# EAGLE board baseboard (EAGLE 7.7.0), part 1 of 2
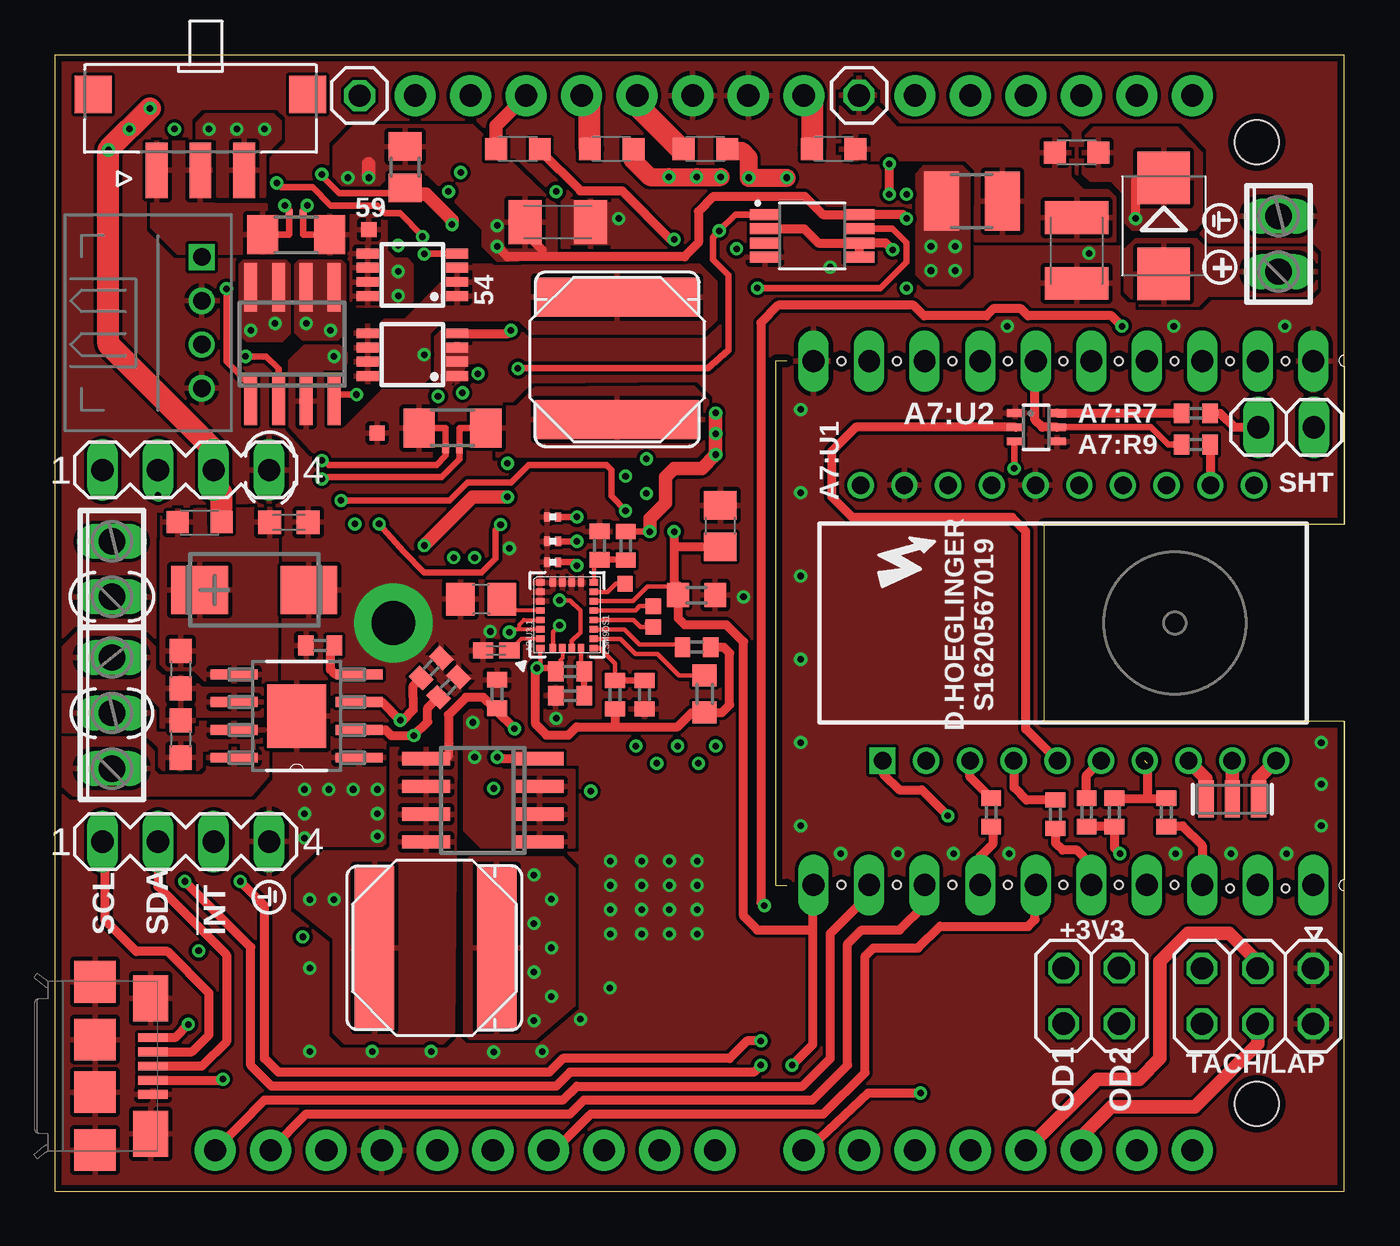
[diagram p0: board, top side]
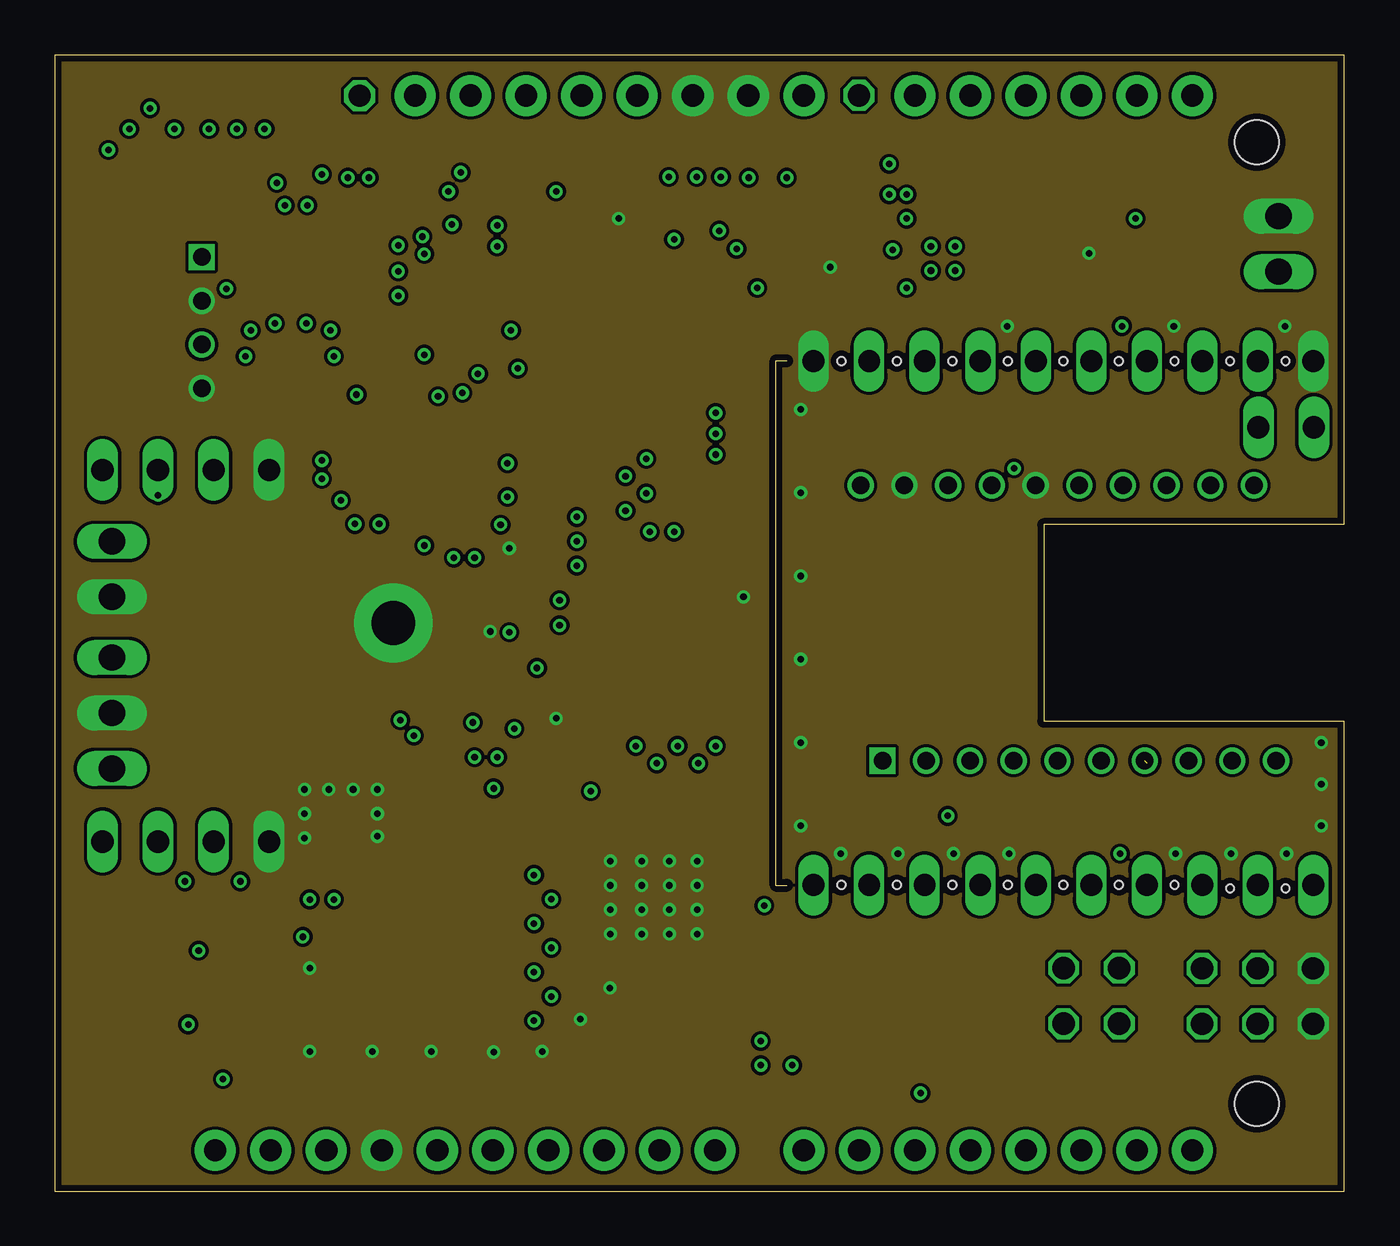
[diagram p1: board, inner layer Route2]
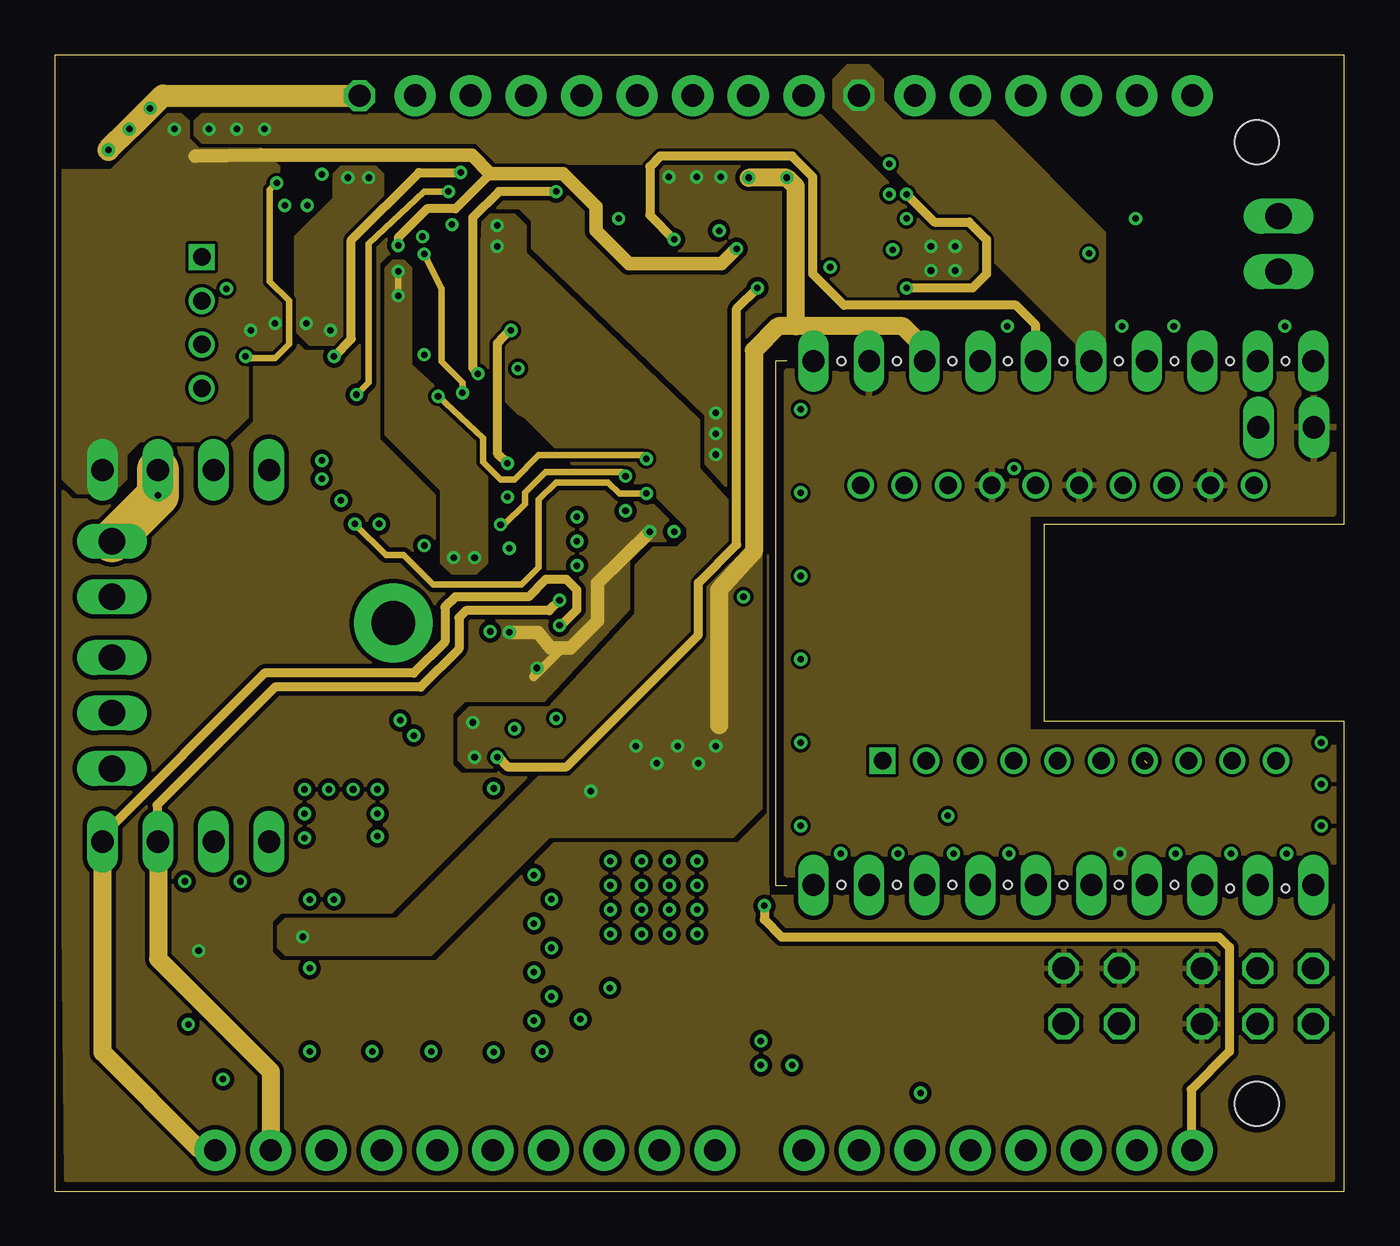
[diagram p2: board, inner layer Route15]
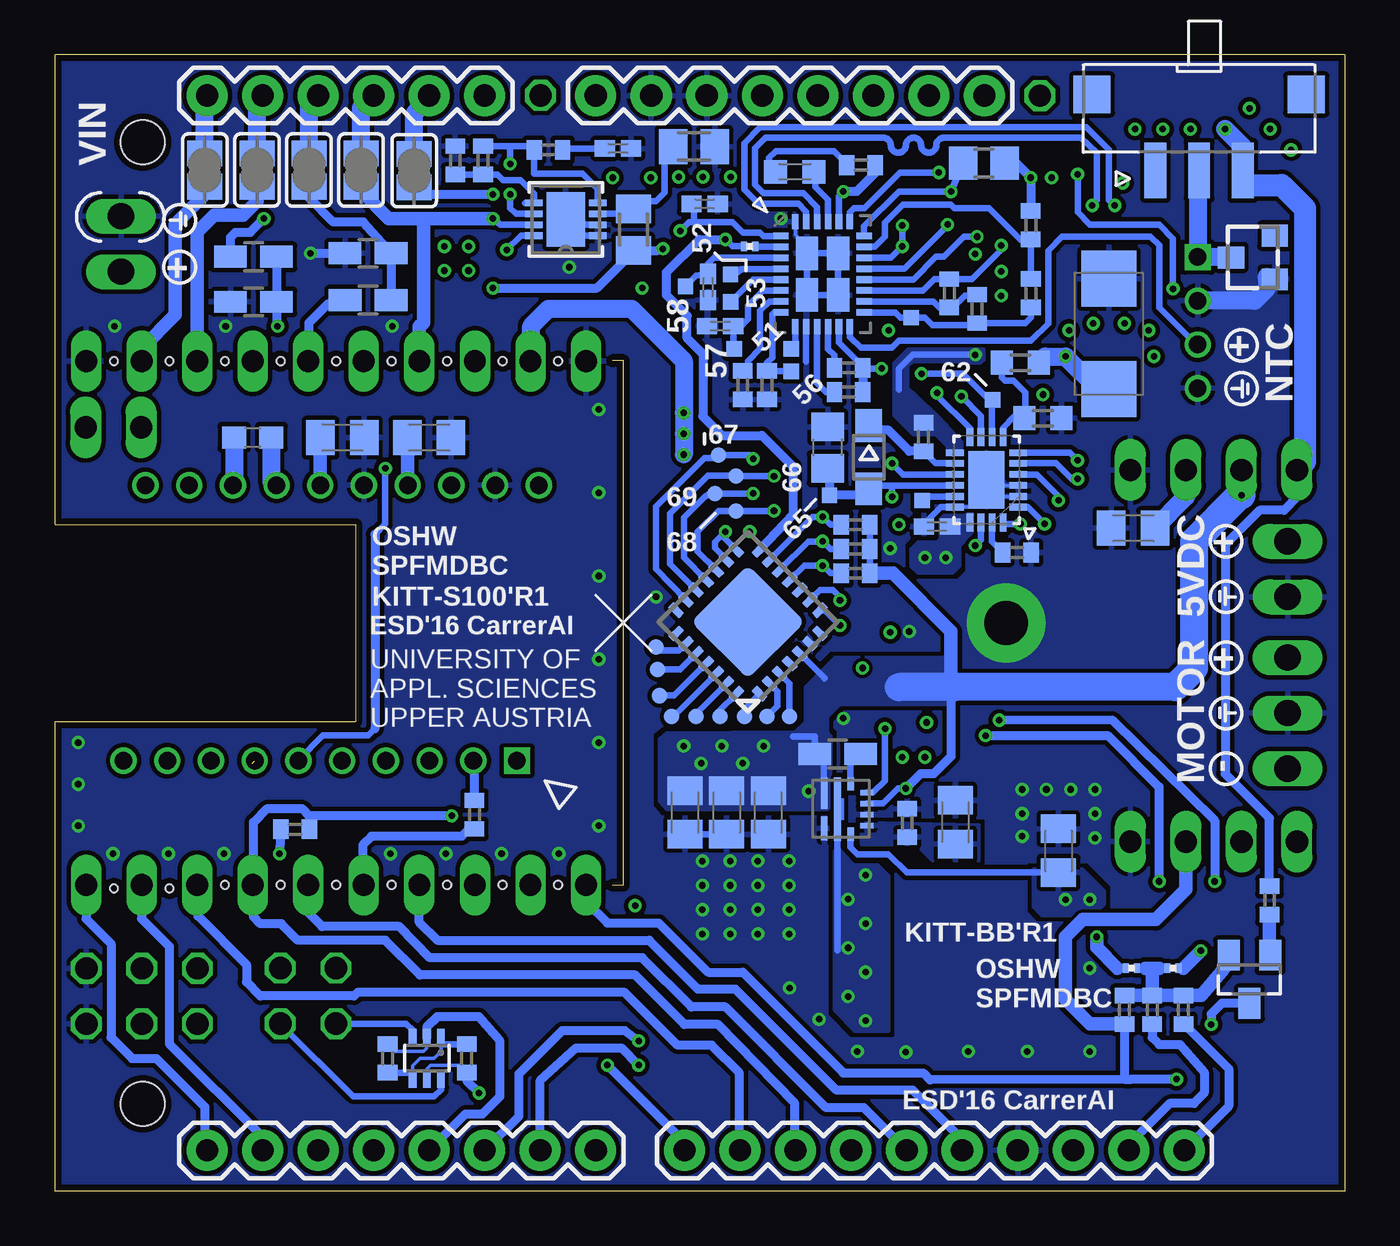
[diagram p3: board, bottom side, seen from below]

Size 59 x 52 mm. Coordinates in mm from the lower left corner, seen from the top.
Outline: 33.5,14 33,14 33,38 33.5,38
Outline: 0,52 0,0 59,0 59,21.5 45.25,21.5 45.25,30.5 59,30.5 59,52 0,52
Copper layers (1+2*15+16): Top 0.035mm / dielectric 0.38mm / Route2 0.035mm / dielectric 0.71mm / Route15 0.035mm / dielectric 0.38mm / Bottom 0.035mm
Design rules "PCB-POOL Standard_ML4": minimum track width 0.15mm, minimum drill 0.3mm, track to track 0.15mm, track to pad 0.15mm, pad to pad 0.15mm, via to via 0.15mm, smd to smd 0.15mm, copper to edge 0.3mm, drill to drill 0.2mm, minimum pad ring 0.2mm, minimum via ring 0.15mm, stop-mask expansion 0.075mm, vias tented up to drill 0mil, thermal gap 0.2mm
Holes 0.35 mm at 35.99,37.98 38.53,37.98 41.07,37.98 43.61,37.98 46.15,37.98 48.69,37.98 51.23,37.98 53.77,37.98 56.31,37.98 56.31,13.85 53.77,13.85 51.23,14.01 48.69,14.01 46.15,14.01 43.61,14.01 41.07,14.01 38.53,14.01 35.99,14.01
Holes 2 mm at 55,4 55,48
Milling: area -49,-60 to -41,-58

## Footprints (pad centres in the part's own frame; a part is rotated, then mirrored left to right if it is on the bottom)
R0402 = smd 0.7 x 0.9: 1 -0.65,0; 2 0.65,0
SC70-6 = smd 0.35 x 0.8: 1 -0.65,-0.95; 2 0,-0.95; 3 0.65,-0.95; 4 0.65,0.95; 5 0,0.95; 6 -0.65,0.95
C0805K = smd 1.3 x 1.6: 1 -1,0; 2 1,0
C0603K = smd 1.05 x 1.08: 1 -0.875,0; 2 0.875,0
CT6032 = smd 2.6 x 2.2: + -2.5,0; - 2.5,0
C0603 = smd 1.1 x 1: 1 -0.85,0; 2 0.85,0
L2012C = smd 1 x 1: 1 -1,0; 2 1,0
HSOP8 = smd 2.15 x 0.45: 1 -2.857,1.905; 2 -2.857,0.635; 3 -2.857,-0.635; 4 -2.857,-1.905; 5 2.857,-1.905; 6 2.857,-0.635; 7 2.857,0.635; 8 2.857,1.905 | smd 2.7 x 2.9: THERMAL 0,0
C0805 = smd 1.3 x 1.5: 1 -0.95,0; 2 0.95,0
C0402K = smd 0.925 x 0.74: 1 -0.6,0; 2 0.6,0
R0603 = smd 1 x 1.1: 1 -0.85,0; 2 0.85,0
LGA-24 = smd 0.29 x 0.4: 1 -0.025,2.45; 6 -0.025,0; 7 0.405,0; 8 0.835,0; 9 1.264,0; 10 1.694,0; 11 2.124,0; 12 2.554,0; 13 2.985,0; 18 2.985,2.45; 19 2.554,2.45; 20 2.124,2.45; 21 1.694,2.45; 22 1.264,2.45; 23 0.835,2.45; 24 0.405,2.45 | smd 0.4 x 0.29: 2 -0.025,1.87; 3 -0.025,1.44; 4 -0.025,1.01; 5 -0.025,0.58; 14 2.985,0.58; 15 2.985,1.01; 16 2.985,1.44; 17 2.985,1.87
TP07SQ = smd 0.7 x 0.7: TP 0,0
C1210K = smd 1.5 x 2.9: 1 -1.5,0; 2 1.5,0
SMB = smd 2.4 x 2.4: A 2.2,0; C -2.2,0
R1210 = smd 1.6 x 2.7: 1 -1.4,0; 2 1.4,0
R0805W = smd 1.5 x 1: 1 -1.052,0; 2 1.052,0
C1206K = smd 1.5 x 2: 1 -1.5,0; 2 1.5,0
R1206-KELV = smd 1.422 x 1.778: + -1.524,0; - 1.524,0 | smd 0.305 x 0.406: K+ -0.318,-0.953; K- 0.318,-0.953
R0805 = smd 1.3 x 1.5: 1 -0.95,0; 2 0.95,0
SOIC8 = smd 0.6 x 2.2: 1 -1.905,-2.6; 2 -0.635,-2.6; 3 0.635,-2.6; 4 1.905,-2.6; 5 1.905,2.6; 6 0.635,2.6; 7 -0.635,2.6; 8 -1.905,2.6
QFN-28_UFD-L = smd 0.703 x 0.3: 1 -1.902,1.75; 2 -1.902,1.25; 3 -1.902,0.75; 4 -1.902,0.25; 5 -1.902,-0.25; 6 -1.902,-0.75; 7 -1.902,-1.25; 8 -1.902,-1.75; 15 1.902,-1.75; 16 1.902,-1.25; 17 1.902,-0.75; 18 1.902,-0.25; 19 1.902,0.25; 20 1.902,0.75; 21 1.902,1.25; 22 1.902,1.75 | smd 0.3 x 0.703: 9 -1.25,-2.402; 10 -0.75,-2.402; 11 -0.25,-2.402; 12 0.25,-2.402; 13 0.75,-2.402; 14 1.25,-2.402; 23 1.25,2.402; 24 0.75,2.402; 25 0.25,2.402; 26 -0.25,2.402; 27 -0.75,2.402; 28 -1.25,2.402 | smd 1.016 x 1.524: EP-NE 0.714,0.953; EP-NW -0.714,0.953; EP-SE 0.714,-0.953; EP-SW -0.714,-0.953
C0402 = smd 0.7 x 0.9: 1 -0.65,0; 2 0.65,0
C/6032-28R = smd 2.55 x 2.5: + 2.525,0; - -2.525,0
SOD323-W = smd 1.5 x 1.2: A 1.45,0; C -1.45,0
TAIYO-YUDEN.NRS8030T4R7MJGJ = smd 1.8 x 7.5: 1 -2.54,0; 2 3.06,0
MSOP8 = smd 0.45 x 1: 1 -0.975,-2.05; 2 -0.325,-2.05; 3 0.325,-2.05; 4 0.975,-2.05; 5 0.975,2.05; 6 0.325,2.05; 7 -0.325,2.05; 8 -0.975,2.05
QFN50P = smd 0.813 x 0.305: 1 -1.448,1.245; 2 -1.448,0.762; 3 -1.448,0.254; 4 -1.448,-0.254; 5 -1.448,-0.762; 6 -1.448,-1.245; 11 1.448,-1.245; 12 1.448,-0.762; 13 1.448,-0.254; 14 1.448,0.254; 15 1.448,0.762; 16 1.448,1.245 | smd 0.305 x 0.813: 7 -0.762,-1.956; 8 -0.254,-1.956; 9 0.254,-1.956; 10 0.762,-1.956; 17 0.762,1.956; 18 0.254,1.956; 19 -0.254,1.956; 20 -0.762,1.956 | smd 1.651 x 2.642: 21 0,0
TP07R = smd 0.7 x 0.7: TP 0,0
C1608 = smd 1.1 x 1: 1 -0.85,0; 2 0.85,0
1X02 = drill 1.016 long: 1 -1.27,0; 2 1.27,0
ADNS-3080 = drill 0.8 square: 1 -8.126,-6.3 | drill 0.8: 2 -6.126,-6.3; 3 -4.126,-6.3; 4 -2.126,-6.3; 5 -0.126,-6.3; 6 1.874,-6.3; 7 3.874,-6.3; 8 5.874,-6.3; 9 7.874,-6.3; 10 9.874,-6.3; 11 8.874,6.3; 12 6.874,6.3; 13 4.874,6.3; 14 2.874,6.3; 15 0.874,6.3; 16 -1.126,6.3; 17 -3.126,6.3; 18 -5.126,6.3; 19 -7.126,6.3; 20 -9.126,6.3
RESON-SMD = smd 0.7 x 1.7: 1 -1.2,0; 2 0,0; 3 1.2,0
PAD40MIL.BREAK = drill 1 pad 1.016 long: P$1 0,0
QFN28-ML_6X6MM = smd 0.7 x 0.35: 1 -2.7,1.95; 2 -2.7,1.3; 3 -2.7,0.65; 4 -2.7,0; 5 -2.7,-0.65; 6 -2.7,-1.3; 7 -2.7,-1.95; 15 2.7,-1.95; 16 2.7,-1.3; 17 2.7,-0.65; 18 2.7,0; 19 2.7,0.65; 20 2.7,1.3; 21 2.7,1.95 | smd 0.35 x 0.7: 8 -1.95,-2.7; 9 -1.3,-2.7; 10 -0.65,-2.7; 11 0,-2.7; 12 0.65,-2.7; 13 1.3,-2.7; 14 1.95,-2.7; 22 1.95,2.7; 23 1.3,2.7; 24 0.65,2.7; 25 0,2.7; 26 -0.65,2.7; 27 -1.3,2.7; 28 -1.95,2.7 | smd 3.7 x 3.7: EXP 0,0
R0201 = smd 0.28 x 0.43: 1 -0.255,0; 2 0.255,0
9-VQFN-HR = smd 1.1 x 0.3: 1 -0.895,0.77 | smd 2.9 x 0.3: 2 0,0.17 | smd 0.6 x 0.3: 3 -1.15,-0.425; 8 1.15,-0.425 | smd 0.25 x 0.6: 4 -0.75,-1.175; 5 -0.25,-1.175; 6 0.25,-1.175; 7 0.75,-1.175 | smd 1.45 x 0.3: 9 0.72,0.77
M0805 = smd 1.3 x 1.6: 1 -0.95,0; 2 0.95,0
DFN-8_DD = smd 0.787 x 0.305: 1 -1.46,0.75; 2 -1.46,0.25; 3 -1.46,-0.25; 4 -1.46,-0.75; 5 1.46,-0.75; 6 1.46,-0.25; 7 1.46,0.25; 8 1.46,0.75 | smd 1.753 x 2.489: EP 0,0
SOP65P490X110-8N = smd 1.38 x 0.5: 1 -2.165,0.975; 2 -2.165,0.325; 3 -2.165,-0.325; 4 -2.165,-0.975; 5 2.165,-0.975; 6 2.165,-0.325; 7 2.165,0.325; 8 2.165,0.975
SOT23 = smd 1 x 1.4: 1 -0.95,-1.1; 2 0.95,-1.1; 3 0,1.1
TO236 = smd 1 x 1.2: 1 -1,-1; 2 0,1; 3 1,-1
10118192-0001LF = smd 0.4 x 1.35: 1 -1.3,4.1; 2 -0.65,4.1; 3 0,4.1; 4 0.65,4.1; 5 1.3,4.1 | smd 1.9 x 1.9: M1 -1.2,1.45; M2 1.2,1.45; S1 -3.85,1.45; S2 3.85,1.45 | smd 2.1 x 1.6: S3 -3.1,4; S4 3.1,4
1X01 = drill 1.016 octagon: 1 0,0
2X02 = drill 1.016 octagon: 1 -1.27,-1.27; 2 -1.27,1.27; 3 1.27,-1.27; 4 1.27,1.27
SW_SS312SAH4-R = smd 2.55 x 1: 1 1.525,-2; 2 1.525,0; 3 1.525,2 | smd 1.7 x 1.7: P$1 -1.95,-4.9; P$2 -1.95,4.9
MA04-1 = drill 1.016 long: 1 -3.81,0; 2 -1.27,0; 3 1.27,0; 4 3.81,0
JST-PHR-4 = drill 0.8 square: 1 0,0 | drill 0.8: 2 -2,0; 3 -4,0; 4 -6,0
2X03 = drill 1.016 octagon: 1 -2.54,-1.27; 2 -2.54,1.27; 3 0,-1.27; 4 0,1.27; 5 2.54,-1.27; 6 2.54,1.27
3POL254 = drill 1.2 long: 1 -2.54,0; 2 0,0; 3 2.54,0
2POL254 = drill 1.2 long: 1 -1.27,0; 2 1.27,0
AU_PINS = drill 1.016 pad 1.88: 3.3V -8.89,-24.13; 5V -6.35,-24.13; ADC.0 6.35,-24.13; ADC.1 8.89,-24.13; ADC.2 11.43,-24.13; ADC.3 13.97,-24.13; ADC.4 16.51,-24.13; ADC.5 19.05,-24.13; AREF -20.574,24.13; GND2 -1.27,-24.13; GND3 -3.81,-24.13; GND.1 -18.034,24.13; I/OREF -13.97,-24.13; IO.0 19.05,24.13; IO.1 16.51,24.13; IO.2 13.97,24.13; IO.3 11.43,24.13; IO.4 8.89,24.13; IO.5 6.35,24.13; IO.6 3.81,24.13; IO.7 1.27,24.13; IO.8 -2.794,24.13; IO.9 -5.334,24.13; IO.10 -7.874,24.13; IO.11 -10.414,24.13; IO.12 -12.954,24.13; IO.13 -15.494,24.13; N/C -16.51,-24.13; RESET -11.43,-24.13; SCL -25.654,24.13; SDA -23.114,24.13; VIN 1.27,-24.13
SJ = smd 1.168 x 1.6: 1 -0.762,0; 2 0.762,0

## Placement (x,y rotation side)
A1:R1  10kR/⎑  [R0402]  43.79,6.08 90 bottom
A1:R2  10kR/⎑  [R0402]  40.17,6.08 270 bottom
A1:U1  SI1922EDH  [SC70-6]  42,6.09 180 bottom
A2:C1  4.7uF/25V  [C0805K]  9.68,30.34 180 bottom
A2:C2  100nF/25V⇤  [C0603K]  10.72,30.61 0 top
A2:C3  47uF/25V⇤  [CT6032]  9.13,27.51 0 top
A2:C4  220nF/25V⇤  [C0603]  5.76,23.86 270 top
A2:C5  220nF/25V⇤  [C0603]  5.76,20.69 270 top
A2:L1  BEAD  [L2012C]  6.63,30.61 0 top
A2:R1  10kR/⎑  [R0402]  17.23,23.94 45 top
A2:R2  10kR/⎑  [R0402]  18.02,23.07 45 top
A2:R3  2k2R  [R0402]  12.14,24.97 180 top
A2:U1  DRV8871  [HSOP8]  11.08,21.74 180 top
A3:C3.1  10nF/⇤  [C0805]  19.52,27.09 180 top
A3:C3.2  100nF/⇤  [C0402K]  20.2,24.74 180 top
A3:C3.XX  10nF/⇤  [C0805]  30.45,30.43 90 top
A3:R3.1  10kR/⎒  [R0603]  29.73,22.75 90 top
A3:R3.2  10kR/⎒  [R0402]  29.37,24.89 180 top
A3:R3.3  10kR/⎑  [R0402]  23.57,22.67 180 top
A3:R3.4  10kR/⎑  [R0402]  26.99,22.72 270 top
A3:R3.5  10kR/⎒  [R0402]  25.64,22.72 90 top
A3:R3.6  10kR/⎒  [R0402]  23.57,23.78 0 top
A3:R3.9  60R/⇤  [R0603]  29.37,27.28 0 top
A3:R3.10  10k/⎒  [R0402]  26.13,29.53 270 top
A3:R3.11  10kR/⎑  [R0402]  24.92,29.54 90 top
A3:U3.1  LSM9DS1  [LGA-24]  24.66,24.87 90 top
A3:☇1  PTR1TP07SQ  [TP07SQ]  27.38,25.81 0 top
A3:☇2  PTR1TP07SQ  [TP07SQ]  27.38,26.77 0 top
A3:☇3  PTR1TP07SQ  [TP07SQ]  26.09,27.8 0 top
A4:C1  10uF  [C1210K]  46.75,43.04 270 top
A4:D1  [SMB]  50.74,44.17 270 top
A4:F1  1.5A->750mA  [R1210]  41.96,45.29 180 top
A4:L1  BEAD  [L2012C]  46.75,47.52 180 top
A4:R1  10kR  [R0805W]  49.93,42.75 180 bottom
A4:R2  2.2kR  [R0805W]  49.93,40.69 0 bottom
A4:R3  10kR  [R0805W]  44.68,40.77 180 bottom
A4:R4  2.2kR  [R0805W]  44.69,42.91 0 bottom
A5:C1  47nF/⇤  [C0603K]  25.16,46.64 0 bottom
A5:C2  100uF/~5V  [C1206K]  23.02,44.34 0 top
A5:C4  1uF/⇤  [C0402K]  29.29,45.17 0 bottom
A5:C5  10nF/⇤  [C0402K]  29.13,41.37 270 bottom
A5:C6  10nF/⇤  [C0402K]  28.58,39.58 180 bottom
A5:R1  8.2mR/⚻  [R1206-KELV]  11.05,43.76 180 top
A5:R2  16kR/⇤  [R0402]  22.13,46.94 0 bottom
A5:R3  1MR  [R0805]  16.51,47.04 180 bottom
A5:R4  270kR  [R0402]  14.37,44.2 90 bottom
A5:R5  5mR  [R0805]  16.03,46.85 90 top
A5:R6  100kR/1%  [R0402]  14.37,41.08 90 bottom
A5:R7  27kR/1%  [R0402]  16.83,40.37 270 bottom
A5:R8  68kR/1%  [R0402]  18.1,41.08 90 bottom
A5:R9  1kR/⇤  [R0402]  26.43,36.88 90 bottom
A5:R10  1kR/⇤  [R0402]  27.54,36.88 90 bottom
A5:R11  10kR/⎒  [R0402]  22.7,37.67 0 bottom
A5:R12  10kR/⎒  [R0402]  22.7,36.56 0 bottom
A5:T1  IRF7328  [SOIC8]  10.88,38.75 0 top
A5:U1  LTC4000LTC4000EUFD#XXX  [QFN-28_UFD-L]  23.89,41.96 0 bottom
A5:☇1  PTR1TP07SQ  [TP07SQ]  25.32,38.54 180 bottom
A5:☇2  PTR1TP07SQ  [TP07SQ]  28.1,40.69 180 bottom
A5:☇3  PTR1TP07SQ  [TP07SQ]  28.1,41.94 180 bottom
A5:☇4  PTR1TP07SQ  [TP07SQ]  19.84,39.97 0 bottom
A5:☇6  PTR1TP07SQ  [TP07SQ]  25.32,37.52 180 bottom
A5:☇7  PTR1TP07SQ  [TP07SQ]  27.94,38.54 180 bottom
A5:☇8  PTR1TP07SQ  [TP07SQ]  30.16,41.4 180 bottom
A5:☇9  PTR1TP07SQ  [TP07SQ]  14.37,43.99 0 top
A6:C1  1nF/⇤  [C0402]  15,29.23 0 bottom
A6:C2  4.7uF/⇤  [C0805]  23.66,34.02 90 bottom
A6:C3  100nF/⇤  [C0402]  19.27,34.5 90 bottom
A6:C4  100uF  [C/6032-28R]  10.8,39.23 270 bottom
A6:C5  1uF/⇤  [C0402K]  18.65,30.42 180 bottom
A6:D1  30VBD,0.2A  [SOD323-W]  21.78,33.58 270 bottom
A6:L1  10uH  [TAIYO-YUDEN.NRS8030T4R7MJGJ]  25.73,37.85 90 top
A6:R1  15mR/25mW⚻  [R1206-KELV]  18.2,34.92 0 top
A6:R2  51kR/1%  [R0603]  14.84,37.91 180 bottom
A6:R3  12kR/1%  [R0603]  13.81,35.37 0 bottom
A6:T1  XX  [MSOP8]  16.37,41.93 90 top
A6:T2  XX  [MSOP8]  16.37,38.28 90 top
A6:U1  LTC3891QFN50P  [QFN50P]  16.39,32.55 180 bottom
A6:☇1  PTR1TP07SQ  [TP07SQ]  19.33,31.6 270 bottom
A6:☇2  PTR1TP07SQ  [TP07SQ]  16.11,36.21 0 bottom
A6:☇3  PTR1TP07SQ  [TP07SQ]  14.75,34.69 0 top
A6:☇5  PTR1TP07SQ  [TP07SQ]  23.57,31.85 180 bottom
A6:☇6  PTR1TP07R  [TP07R]  27.86,32.72 180 bottom
A6:☇7  PTR1TP07R  [TP07R]  28.66,33.67 0 bottom
A6:☇8  PTR1TP07R  [TP07R]  27.86,31.13 0 bottom
A6:☇9  PTR1TP07R  [TP07R]  28.81,31.92 180 bottom
A7:C1  2.2uF/⇤  [C1608]  49.96,34.49 0 bottom
A7:C2  100nF/⇤  [C0805K]  41.89,34.48 0 bottom
A7:C3  100nF/⇤  [C0805K]  45.86,34.48 0 bottom
A7:DCL1  DCL.OSH'3MM-SLK'  [DCL.LOGO-OSH.3MM]  18.78,9.38 0 bottom
A7:DCL2  DCL.OSH'3MM-SLK'  [DCL.LOGO-OSH.3MM]  35.46,29.4 0 bottom
A7:J1  [1X02]  56.34,34.95 180 top
A7:R1  10kR/⎒  [R0402]  48.02,16.56 0 bottom
A7:R2  100R/⇤  [R0402]  39.82,17.23 90 bottom
A7:R3  100R/⇤  [R0402]  42.84,17.33 90 top
A7:R4  100R/⇤  [R0402]  45.78,17.25 90 top
A7:R5  10kR/⎒  [R0402]  47.21,17.33 90 top
A7:R6  10kR/⎒  [R0402]  48.48,17.33 90 top
A7:R7  200R  [R0402]  52.21,35.59 0 top
A7:R8  0R  [R0402]  50.86,17.33 270 top
A7:R9  10kR/⎒  [R0402]  52.21,34.16 180 top
A7:U1  ADNS-3080  [ADNS-3080]  46,26 0 top
A7:U2  SI1922EDH  [SC70-6]  44.91,34.95 270 top
A7:Y1  24MHz  [RESON-SMD]  53.87,17.95 180 top
A7:⌁1  SINGLEPAD40MIL-BREAK  [PAD40MIL.BREAK]  34.72,37.98 0 top
A7:⌁2  SINGLEPAD40MIL-BREAK  [PAD40MIL.BREAK]  47.42,37.98 0 top
A7:⌁3  SINGLEPAD40MIL-BREAK  [PAD40MIL.BREAK]  42.34,37.98 0 top
A7:⌁4  SINGLEPAD40MIL-BREAK  [PAD40MIL.BREAK]  37.26,37.98 0 top
A7:⌁5  SINGLEPAD40MIL-BREAK  [PAD40MIL.BREAK]  39.8,37.98 0 top
A7:⌁6  SINGLEPAD40MIL-BREAK  [PAD40MIL.BREAK]  44.88,37.98 0 top
A7:⌁7  SINGLEPAD40MIL-BREAK  [PAD40MIL.BREAK]  49.96,37.98 0 top
A7:⌁8  SINGLEPAD40MIL-BREAK  [PAD40MIL.BREAK]  52.5,37.98 0 top
A7:⌁9  SINGLEPAD40MIL-BREAK  [PAD40MIL.BREAK]  55.04,37.98 0 top
A7:⌁10  SINGLEPAD40MIL-BREAK  [PAD40MIL.BREAK]  57.58,37.98 0 top
A7:⌁11  SINGLEPAD40MIL-BREAK  [PAD40MIL.BREAK]  57.58,14.01 180 top
A7:⌁12  SINGLEPAD40MIL-BREAK  [PAD40MIL.BREAK]  55.04,14.01 180 top
A7:⌁13  SINGLEPAD40MIL-BREAK  [PAD40MIL.BREAK]  52.5,14.01 180 top
A7:⌁14  SINGLEPAD40MIL-BREAK  [PAD40MIL.BREAK]  49.96,14.01 180 top
A7:⌁15  SINGLEPAD40MIL-BREAK  [PAD40MIL.BREAK]  47.42,14.01 180 top
A7:⌁16  SINGLEPAD40MIL-BREAK  [PAD40MIL.BREAK]  44.88,14.01 180 top
A7:⌁17  SINGLEPAD40MIL-BREAK  [PAD40MIL.BREAK]  42.34,14.01 180 top
A7:⌁18  SINGLEPAD40MIL-BREAK  [PAD40MIL.BREAK]  39.8,14.01 180 top
A7:⌁19  SINGLEPAD40MIL-BREAK  [PAD40MIL.BREAK]  37.26,14.01 180 top
A7:⌁20  SINGLEPAD40MIL-BREAK  [PAD40MIL.BREAK]  34.72,14.01 180 top
A8:IC1  MCP23017ML  [QFN28-ML_6X6MM]  27.31,26.05 135 bottom
A8:R1  10kR/⎒  [R0402]  22.38,29.38 180 bottom
A8:R2  10kR/⎑  [R0201]  22.78,29.74 180 top
A8:R3  10kR/⎒  [R0402]  22.38,30.5 180 bottom
A8:R4  10kR/⎒  [R0201]  22.78,30.85 180 top
A8:R5  10kR/⎒  [R0402]  22.38,28.27 180 bottom
A8:R6  10kR/⎒  [R0201]  22.78,28.78 180 top
A8:TP2  TPTP07R  [TP07R]  31.51,24.89 0 bottom
A8:TP3  TPTP07R  [TP07R]  31.43,23.86 0 bottom
A8:TP4  TPTP07R  [TP07R]  31.35,22.67 0 bottom
A9:C1  10uF/⇤  [C0805K]  13.1,15.58 90 bottom
A9:C2  22uF/⇤  [C0805K]  26.37,17.33 270 bottom
A9:C3  22uF/⇤  [C0805K]  28.28,17.33 270 bottom
A9:C4  22uF/⇤  [C0805K]  30.18,17.33 270 bottom
A9:C5  100nF  [C0805K]  17.81,16.89 90 bottom
A9:L1  1uH  [TAIYO-YUDEN.NRS8030T4R7MJGJ]  17.17,11.14 0 top
A9:R1  10kR/⎒  [R0805W]  23.2,20 180 bottom
A9:R2  0R/⎵  [R0402]  20.02,16.85 270 bottom
A9:R3  100kR/⎵  [R0402]  20.24,22.75 270 top
A9:U1  TPS6123X5V  [9-VQFN-HR]  23.04,17.49 90 bottom
A10:C1  1uF/⇤  [C0402K]  33.26,47.71 0 bottom
A10:R1  430R  [R0402]  36.43,47.64 180 bottom
A10:R2  25kR  [R0402]  39.43,47.17 270 bottom
A10:R3  XXMR  [M0805]  29.77,47.8 180 bottom
A10:R4  XXMR  [M0805]  32.54,43.99 270 bottom
A10:R7  2.32MR  [R0402]  40.7,47.17 270 bottom
A10:REF1  EAGLE EDU LIMIT  [REF_EAGLE.EDULIMIT]  -109.5,-176.5 0 top  (outside the outline)
A10:REF2  REF.LOGO.UASUA  [REF_LOGO_UASUA]  -116.5,-192 0 top  (outside the outline)
A10:T1  SI4427BDY  [SOIC8]  19.59,17.89 90 top
A10:U1  LTC1540CDD  [DFN-8_DD]  35.64,44.47 180 bottom
A10:U2  2NANDSOP8  [SOP65P490X110-8N]  34.65,43.71 0 top
D1  BAS40-05  [SOT23]  4.37,9.7 180 bottom
D2  MMBZXAL  [TO236]  4.21,42.72 90 bottom
J1  MICROUSB-FEM  [10118192-0001LF]  0.4,5.73 270 top
JP1  [1X01]  36.8,50.14 0 top
JP2  [1X01]  13.95,50.13 0 top
JP4  [2X02]  47.43,8.94 0 top
L1  BEAD/0R/⎵  [L2012C]  29.77,47.67 180 top
L2  BEAD/0R/⎵  [L2012C]  25.48,47.67 180 top
L4  BEAD/0R/⎵  [L2012C]  35.64,47.67 180 top
L5  BEAD/0R/⎵  [L2012C]  21.19,47.67 180 top
R1  100R  [R0402]  3.45,13.31 270 bottom
R2  [R0201]  27.23,43.23 0 bottom
R3  10k/⎒  [R0402]  7.38,8.3 90 bottom
R4  10k/⎒  [R0402]  8.81,8.3 90 bottom
R5  10k/⎒  [R0402]  10.08,8.3 90 bottom
R6  [R0201]  7.86,10.21 0 bottom
R7  [R0201]  9.76,10.21 180 bottom
S1  SS312SAH4-R  [SW_SS312SAH4-R]  6.67,48.23 270 bottom
S3  SS312SAH4-R  [SW_SS312SAH4-R]  6.67,48.23 270 top
SV1  [MA04-1]  6,16 0 top
SV2  [MA04-1]  6,33 0 top
TP2  TPTP07R  [TP07R]  30.8,21.72 0 bottom
TP3  TPTP07R  [TP07R]  29.69,21.72 0 bottom
TP4  TPTP07R  [TP07R]  28.58,21.72 0 bottom
TP5  TPTP07R  [TP07R]  27.46,21.72 0 bottom
TP6  TPTP07R  [TP07R]  26.43,21.72 0 bottom
TP7  TPTP07R  [TP07R]  25.4,21.72 0 bottom
U$1  [A4L-LOC]  -56.25,-67.25 0 top  (outside the outline)
X1  JST-4POS-2X4POS  [JST-PHR-4]  6.73,42.74 90 top
X1.2  TACH/LAP  [2X03]  55.03,8.93 180 top
X2  [3POL254]  2.62,21.88 90 top
X2.2  VRAILS+  [2POL254]  55.99,43.34 90 top
X2.3  5V+SoC  [2POL254]  2.62,28.47 90 top
XA1  ARDUINO_UNO  [AU_PINS]  33,26 180 bottom
☈1  [SJ]  42.58,46.69 90 bottom
☈2  [SJ]  45.01,46.72 90 bottom
☈3  [SJ]  47.39,46.72 90 bottom
☈10  [SJ]  49.77,46.72 90 bottom
☈11  [SJ]  52.15,46.72 90 bottom

## Library data of the parts
A1:R1 A1:R2 A2:C1-A2:C3 A2:L1 A2:R1-A2:R3 A3:C3.1 A3:C3.2 A3:C3.XX A3:R3.1-A3:R3.6 A3:R3.9-A3:R3.11 A4:C1 A4:F1 A4:L1 A4:R1-A4:R4 A5:C1 A5:C2 A5:C4-A5:C6 A5:R2-A5:R12 A6:C1-A6:C5 A6:R2 A6:R3 A7:C1-A7:C3 A7:R1-A7:R9 A8:R1-A8:R6 A9:C1-A9:C5 A9:R1 A10:C1 A10:R1-A10:R4 A10:R7 L1 L2 L4 L5 R1-R7 = rcl
A1:U1 A2:U1 A6:U1 A7:U1 A7:U2 A10:T1 A10:U2 = kitt.ic
A2:C4 A2:C5 A9:R2 A9:R3 = resistor
A3:U3.1 = kitt.ic; AVAILABILITY: Unavailable; CC: XYX17; DESCRIPTION: iNEMO inertial module: 3D accelerometer, 3D gyroscope, 3D magnetometer; MF: STMicroelectronics; MP: LSM9DS1; PACKAGE: None; PRICE: None
A3:☇1-A3:☇3 A5:☇1-A5:☇4 A5:☇6-A5:☇9 A6:☇1-A6:☇3 A6:☇5-A6:☇9 A8:TP2-A8:TP4 TP2-TP7 = testpad
A4:D1 A6:D1 D1 = diode
A5:R1 A6:L1 A6:R1 A9:L1 = kitt.psvs
A5:T1 A5:U1 A9:U1 A10:U1 D2 = kitt.ic; CC: XYX17
A6:T1 A6:T2 = zetex; OC_FARNELL: unknown; OC_NEWARK: unknown
A7:DCL1 A7:DCL2 A10:REF1 A10:REF2 = kitt.refs
A7:J1 JP1 JP2 JP4 X1.2 = pinhead
A7:Y1 = Ai_Passives
A7:⌁1-A7:⌁20 XA1 = kitt.con
A8:IC1 = microchip; MF: MICROCHIP; MPN: MCP23017-E/ML; OC_FARNELL: unknown; OC_NEWARK: 31K2957
J1 = kitt.con; AVAILABILITY: Good; DESCRIPTION: Conn Micro USB Type B RCP 5 POS 0.65mm Solder RA SMD 5 Terminal 1 Port T/R; MF: FCI; MP: 10118192-0001LF; PACKAGE: None; PRICE: 0.24 USD
S1 S3 = kitt.psvs; AVAILABILITY: Good; DESCRIPTION: Switch Slide ON None ON SPDT Side Slide 0.1A 28VAC 28VDC 0.4VA 10000Cycles Gull Wing SMD T/R; MF: NKK Switches; MP: SS312SAH4-R; PACKAGE: None; PRICE: 2.48 USD
SV1 SV2 = con-lstb; OC_FARNELL: unknown; OC_NEWARK: unknown
U$1 = frames
X1 = kitt.con; CC: XYX17
X2 X2.2 X2.3 = con-phoenix-254; OC_FARNELL: unknown; OC_NEWARK: unknown
☈1-☈3 ☈10 ☈11 = jumper

## Nets
!CS0: A7:R1.2 A7:U1.1 A7:⌁14.P$1 XA1.IO.10
!CS1: A7:R8.2 A7:⌁13.P$1 XA1.IO.9
!RST: A5:U1.2 R2.2
+3V3: A3:R3.1.1 A3:R3.2.1 A3:R3.5.1 A3:R3.6.1 A3:R3.10.1 A3:U3.1.1 A3:U3.1.3 A3:U3.1.22 A3:U3.1.23 A7:C2.1 A7:C3.1 A7:J1.1 A7:R1.1 A7:R5.1 A7:R6.1 A7:R9.1 A7:U1.12 A7:U1.15 A7:U1.17 A7:⌁4.P$1 JP4.2 JP4.4 L2.1 R6.2 X1.2.5 X1.2.6
+4.1V: A5:R8.2 A5:T1.7 A5:T1.8 A5:U1.17 A10:R4.2 R1.1 S1.3 SV2.1 ☈1.1
+5V: A7:⌁5.P$1 A8:IC1.5 A8:R1.1 A8:R3.1 A8:R5.1 A9:C2.1 A9:C3.1 A9:C4.1 A9:R1.2 A9:U1.6 A9:U1.9 L1.1 R7.2 SV2.2 X2.3.2
+18V: A2:C1.1 A2:L1.2 JP2.1 SV2.3
+24V: A4:C1.1 A4:F1.1 A4:L1.2 A4:R3.2 A7:⌁2.P$1 JP1.1 L4.1
A1:COM: A1:R1.1 A1:R2.1 A1:U1.1 A1:U1.4
A2:ILIM: A2:R3.1 A2:U1.4
A2:VM: A2:C2.1 A2:C3.+ A2:C4.1 A2:L1.1 A2:U1.5
A3:CS_AG: A3:R3.1.2 A3:U3.1.7
A3:CS_M: A3:R3.2.2 A3:U3.1.8
A3:DEN_AG: A3:R3.10.2 A3:R3.11.1 A3:U3.1.13
A3:DRDY_M: A3:U3.1.9 A3:☇1.TP
A3:INT2_AG: A3:U3.1.12 A3:☇3.TP
A3:INT_M: A3:U3.1.10 A3:☇2.TP
A3:SDO_AG: A3:R3.3.1 A3:R3.6.2 A3:U3.1.5
A3:SDO_M: A3:R3.4.1 A3:R3.5.2 A3:U3.1.6
A3:↔C1: A3:C3.2.1 A3:U3.1.24
A3:↔CAP: A3:C3.1.1 A3:U3.1.21
A4:N$1: A4:D1.C A4:L1.1 A4:R1.2
A5:BGATE: A5:T1.2 A5:U1.18
A5:CC: A5:C1.2 A5:U1.25
A5:CL: A5:R9.2 A5:U1.8 A5:☇6.TP
A5:CSN: A5:R5.1 A5:T1.1 A5:U1.19
A5:CX: A5:R10.2 A5:U1.7
A5:IBMON: A5:C6.1 A5:U1.6 A5:☇7.TP
A5:IGATE: A5:R3.2 A5:T1.4 A5:U1.22
A5:IIMON: A5:C5.1 A5:U1.3 A5:☇8.TP
A5:IL: A5:U1.4 A5:☇3.TP
A5:N$4: A5:C1.1 A5:R2.1
A5:N$8: A5:R7.1 A5:R8.1 A5:U1.16
A5:OFB: A5:R4.1 A5:R6.2 A5:U1.21
A5:TMR: A5:U1.9 A5:☇1.TP
A5:↔CLN: A5:R1.K+ A5:U1.26
A5:↔FBG: A5:R6.1 A5:R7.2 A5:U1.15 A5:☇4.TP
A5:↔IN: A5:R1.K- A5:U1.27
A6:BG: A6:T2.4 A6:U1.13
A6:DDC.EXTVCC: A6:U1.15 A6:☇1.TP
A6:SW✳: A6:C3.2 A6:L1.2 A6:T1.1 A6:T1.2 A6:T1.3 A6:T2.5 A6:T2.6 A6:T2.7 A6:T2.8 A6:U1.11
A6:TG: A6:T1.4 A6:U1.10
A6:TRACK/SS: A6:C1.1 A6:U1.19
A6:~SENSE+: A6:L1.1 A6:R1.-
A6:↔BOOST: A6:C3.1 A6:D1.C A6:U1.12
A6:↔ILIM: A6:C2.1 A6:D1.A A6:U1.14 A6:U1.18 A6:☇5.TP
A6:↔SENSE+: A6:R1.K+ A6:U1.6
A6:↔SENSE-: A6:R1.K- A6:U1.5
A6:↔VFB: A6:R2.2 A6:R3.1 A6:U1.7
A7:!PD: A7:R6.2 A7:R8.1 A7:U1.7
A7:ADC2: A7:⌁7.P$1
A7:LEDCTRL: A7:U1.5 A7:U2.2
A7:N$1: A7:R7.1 A7:U2.6
A7:N$5: A7:C1.1 A7:U1.13
A7:N$6: A7:C1.2 A7:U1.14
A7:N$8: A7:J1.2 A7:R7.2
A7:RST: A7:R5.2 A7:U1.6 A7:U2.3
A7:U1.GUARD: A7:U1.9 A7:Y1.2
A7:U1.MISO: A7:R2.2 A7:U1.2
A7:U1.MOSI: A7:R4.2 A7:U1.4
A7:U1.OSCIN✳: A7:U1.10 A7:Y1.1
A7:U1.OSCOUT✳: A7:U1.8 A7:Y1.3
A7:U1.SCLK: A7:R3.2 A7:U1.3
A8:A0: A8:IC1.11 A8:R5.2 A8:R6.1
A8:A1: A8:IC1.12 A8:R1.2 A8:R2.1
A8:A2: A8:IC1.13 A8:R3.2 A8:R4.1
A8:N$3: A8:IC1.23 A8:TP2.TP
A8:N$4: A8:IC1.24 A8:TP3.TP
A8:N$5: A8:IC1.25 A8:TP4.TP
A9:CC: A9:C5.1 A9:R2.2 A9:U1.4
A9:✳SW: A9:L1.2 A9:U1.2
A10.!ACT: A10:T1.4 A10:U2.7
A10:BATOK: A10:U1.8 A10:U2.2 A10:U2.5 A10:U2.6
A10:COMP: A10:C1.1 A10:R1.1
A10:HYST: A10:R2.2 A10:R7.2 A10:U1.5
A10:IN-: A10:R3.2 A10:R4.1 A10:U1.3
A10:REF: A10:R1.2 A10:R2.1 A10:U1.4 A10:U1.6
CORE.ADCX: A7:⌁8.P$1 ☈10.1
CORE.ADCY: A7:⌁9.P$1 ☈11.1
DDC.CLN/VIN: A5:R1.+ A5:☇9.TP A6:C5.1 A6:T1.5 A6:T1.6 A6:T1.7 A6:T1.8 A6:U1.17
GND: A2:C1.2 A2:C2.2 A2:C3.- A2:C5.2 A2:R1.2 A2:R2.2 A2:R3.2 A2:U1.1 A2:U1.7 A2:U1.THERMAL A3:C3.1.2 A3:C3.2.2 A3:C3.XX.2 A3:R3.3.2 A3:R3.4.2 A3:R3.9.2 A3:R3.11.2 A3:U3.1.14 A3:U3.1.15 A3:U3.1.16 A3:U3.1.17 A3:U3.1.18 A3:U3.1.19 A3:U3.1.20 A4:C1.2 A4:R2.1 A4:R4.1 A5:C2.2 A5:C4.2 A5:C5.2 A5:C6.2 A5:R9.1 A5:R10.1 A5:U1.10 A5:U1.28 A5:U1.EP-NE A5:U1.EP-NW A5:U1.EP-SE A5:U1.EP-SW A6:C1.2 A6:C2.2 A6:C4.- A6:C5.2 A6:R3.2 A6:T2.1 A6:T2.2 A6:T2.3 A6:U1.2 A6:U1.3 A6:U1.16 A6:U1.21 A7:C2.2 A7:C3.2 A7:U1.16 A7:U1.19 A7:U2.1 A7:U2.4 A7:⌁1.P$1 A7:⌁10.P$1 A8:IC1.6 A8:R2.2 A8:R4.2 A8:R6.2 A9:C1.2 A9:C2.2 A9:C3.2 A9:C4.2 A9:C5.2 A9:R2.1 A9:R3.1 A9:U1.1 A9:U1.5 A10:C1.2 A10:R3.1 A10:R7.1 A10:U1.1 A10:U1.2 A10:U1.EP A10:U2.4 D2.1 J1.5 J1.M1 J1.M2 J1.S1 J1.S2 J1.S3 J1.S4 SV1.4 SV2.4 X1.2 X1.2.1 X1.2.2 X1.4 X2.2 X2.2.2 X2.3.1 XA1.GND2 XA1.GND3 XA1.GND.1
ITH: A5:R2.2 A5:U1.24 A6:U1.8 A6:☇2.TP
LAP: X1.2.4 XA1.IO.2
MISO: A7:R2.1 A7:⌁16.P$1 XA1.IO.11
MOSI: A7:R4.1 A7:⌁15.P$1 XA1.IO.12
N$1: D1.3 J1.1
N$2: A1:U1.3 JP4.1
N$3: A1:U1.6 JP4.3
N$4: D1.1 R1.2
N$5: A1:R2.2 A1:U1.5 XA1.IO.7
N$6: A1:R1.2 A1:U1.2 XA1.IO.4
N$7: XA1.ADC.3 ☈3.2
N$8: XA1.ADC.2 ☈2.2
N$9: XA1.ADC.1 ☈1.2
N$11: D1.2 R3.2 R4.2 R5.2 R6.1 R7.1
PWR.MOTA: A2:R2.1 A2:U1.2 XA1.IO.5
PWR.MOTB: A2:R1.1 A2:U1.3 XA1.IO.6
SCLK: A7:R3.1 A7:⌁17.P$1 XA1.IO.13
SYSTWI.!INT: A3:C3.XX.1 A3:R3.9.1 A3:U3.1.11 A7:⌁20.P$1 A8:IC1.15 A8:IC1.16 J1.4 R5.1 SV1.3 XA1.IO.8
SYSTWI.SCL: A3:U3.1.2 A7:⌁19.P$1 A8:IC1.8 J1.2 R3.1 SV1.1 XA1.SCL
SYSTWI.SDA: A3:U3.1.4 A7:⌁18.P$1 A8:IC1.9 J1.3 R4.1 SV1.2 XA1.SDA
TACH: X1.2.3 XA1.IO.3
TOP1: A8:IC1.26 TP2.TP
TOP2: A8:IC1.27 TP3.TP
TOP3: A8:IC1.28 TP4.TP
TOP4: A8:IC1.1 TP5.TP
TOP5: A8:IC1.2 TP6.TP
TOP6: A8:IC1.3 TP7.TP
TOP7: A8:IC1.4
TOP.!BATOK: A10:U2.3
TOP.!CHRG: A5:R11.1 A5:U1.12
TOP.!FLT: A5:R12.1 A5:U1.11
TOP.!RST: A7:R9.2 A7:U2.5 A7:⌁6.P$1 A8:IC1.14 L5.1 R2.1
TOP.BAT+NTC: A5:U1.14 X1.3
TOP.BAT/CON: D2.2 S1.2 X1.1
TOP.ENC: A5:U1.5 A5:☇2.TP
TOP.FREQ: A6:U1.20 A6:☇6.TP A8:IC1.19
TOP.INACT: A9:R1.1 A9:U1.8
TOP.MODE: A6:U1.1 A6:☇9.TP A8:IC1.18
TOP.MOT-: A2:U1.8 X2.1
TOP.MTXS: A7:⌁12.P$1 XA1.IO.1
TOP.MVPRW: A4:R3.1 A4:R4.2 ☈3.1
TOP.OS1IS2: A5:T1.3 A5:U1.23 A6:C4.+ A6:R1.+ A6:R2.1 A6:☇3.TP
TOP.PGOOD: A6:U1.9 A6:☇7.TP A8:IC1.20
TOP.PWRON: A5:C4.1 A5:R11.2 A5:R12.2 A5:U1.1 A5:U1.13 A10:U2.1
TOP.RRX: A4:R1.1 A4:R2.2 A7:⌁11.P$1 XA1.IO.0
TOP.RUN: A6:U1.4 A6:☇8.TP A8:IC1.17
TOP.VSYS/GUARD: A9:C1.1 A9:L1.1 A9:R3.2 A9:U1.3 A9:U1.7 A10:T1.5 A10:T1.6 A10:T1.7 A10:T1.8
UNO.3V3: L2.2 XA1.3.3V
UNO.5V: L1.2 XA1.5V
UNO.ADC4: XA1.ADC.4 ☈10.2
UNO.ADC5: XA1.ADC.5 ☈11.2
UNO.RESET: L5.2 XA1.RESET
UNO.VIN: L4.2 XA1.VIN
VCC/2: A4:D1.A X2.2.1
VDD: A5:C2.1 A5:R3.1 A5:R4.2 A5:R5.2 A5:T1.5 A5:T1.6 A5:U1.20 A7:⌁3.P$1 A10:T1.1 A10:T1.2 A10:T1.3 A10:U1.7 A10:U2.8 ☈2.1
VF+OUT/IPC: A4:F1.2 S3.3
VF+OUT/SWITCH: A5:R1.- S3.1 S3.2
✳TOP.MOT+: A2:C4.2 A2:C5.1 A2:U1.6 X2.3